# Altium PCB Placa.PcbDoc
Units mm, origin at the board's own origin, x right, y up, seen from the top; angles counter-clockwise.
Board outline 100 x 100 mm, 2 copper layers (Top Layer, Bottom Layer); 78 components, 64 nets, 247 pads, 21 vias.
Unrouted connection lines stored in the file: 1.
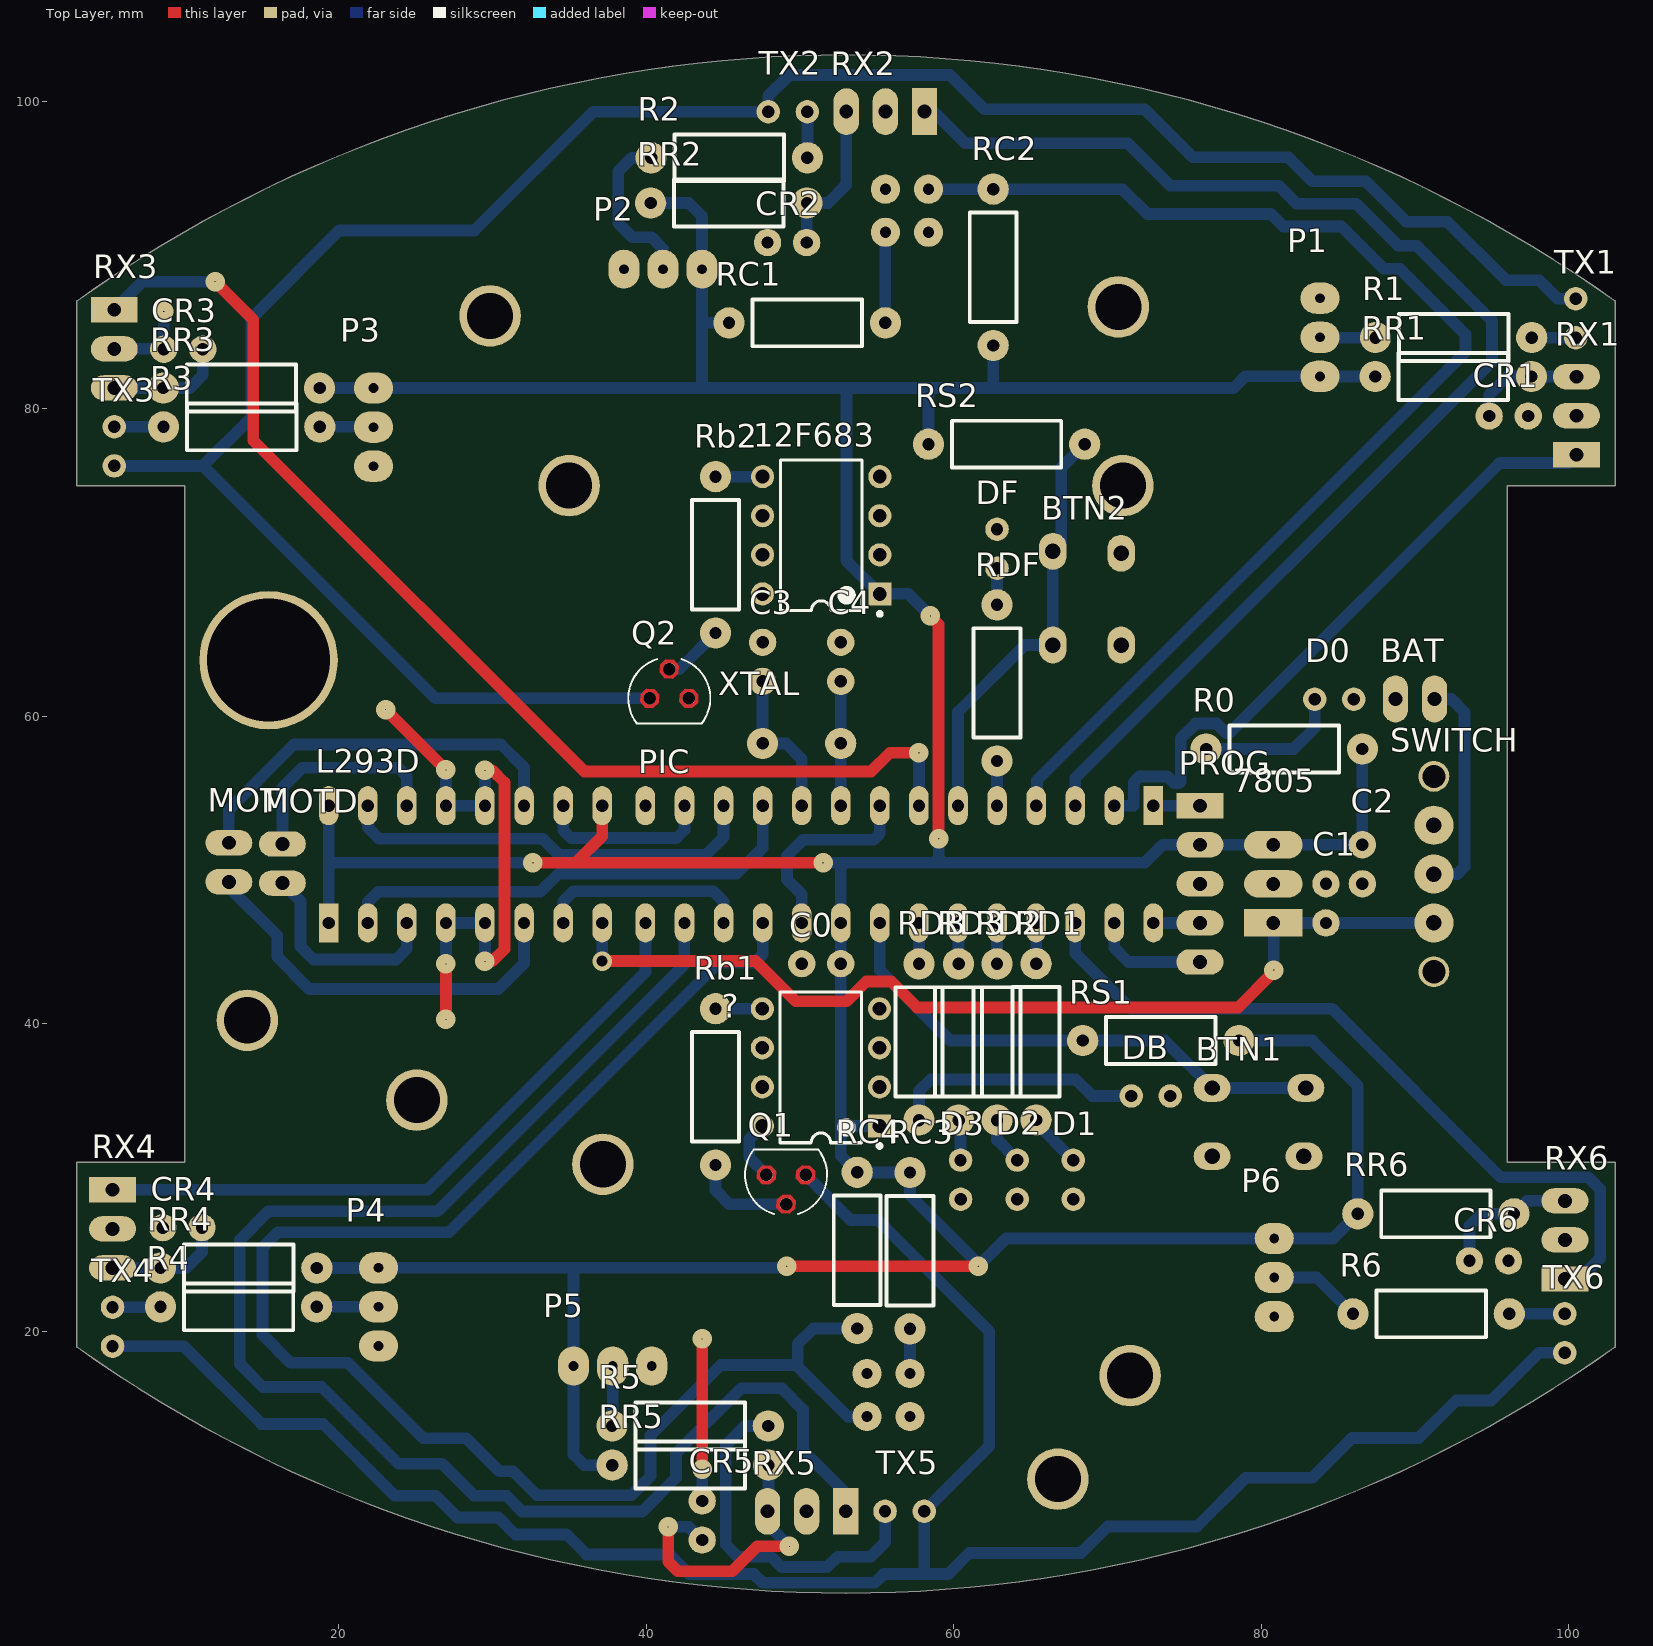
[diagram p0: Top Layer view]
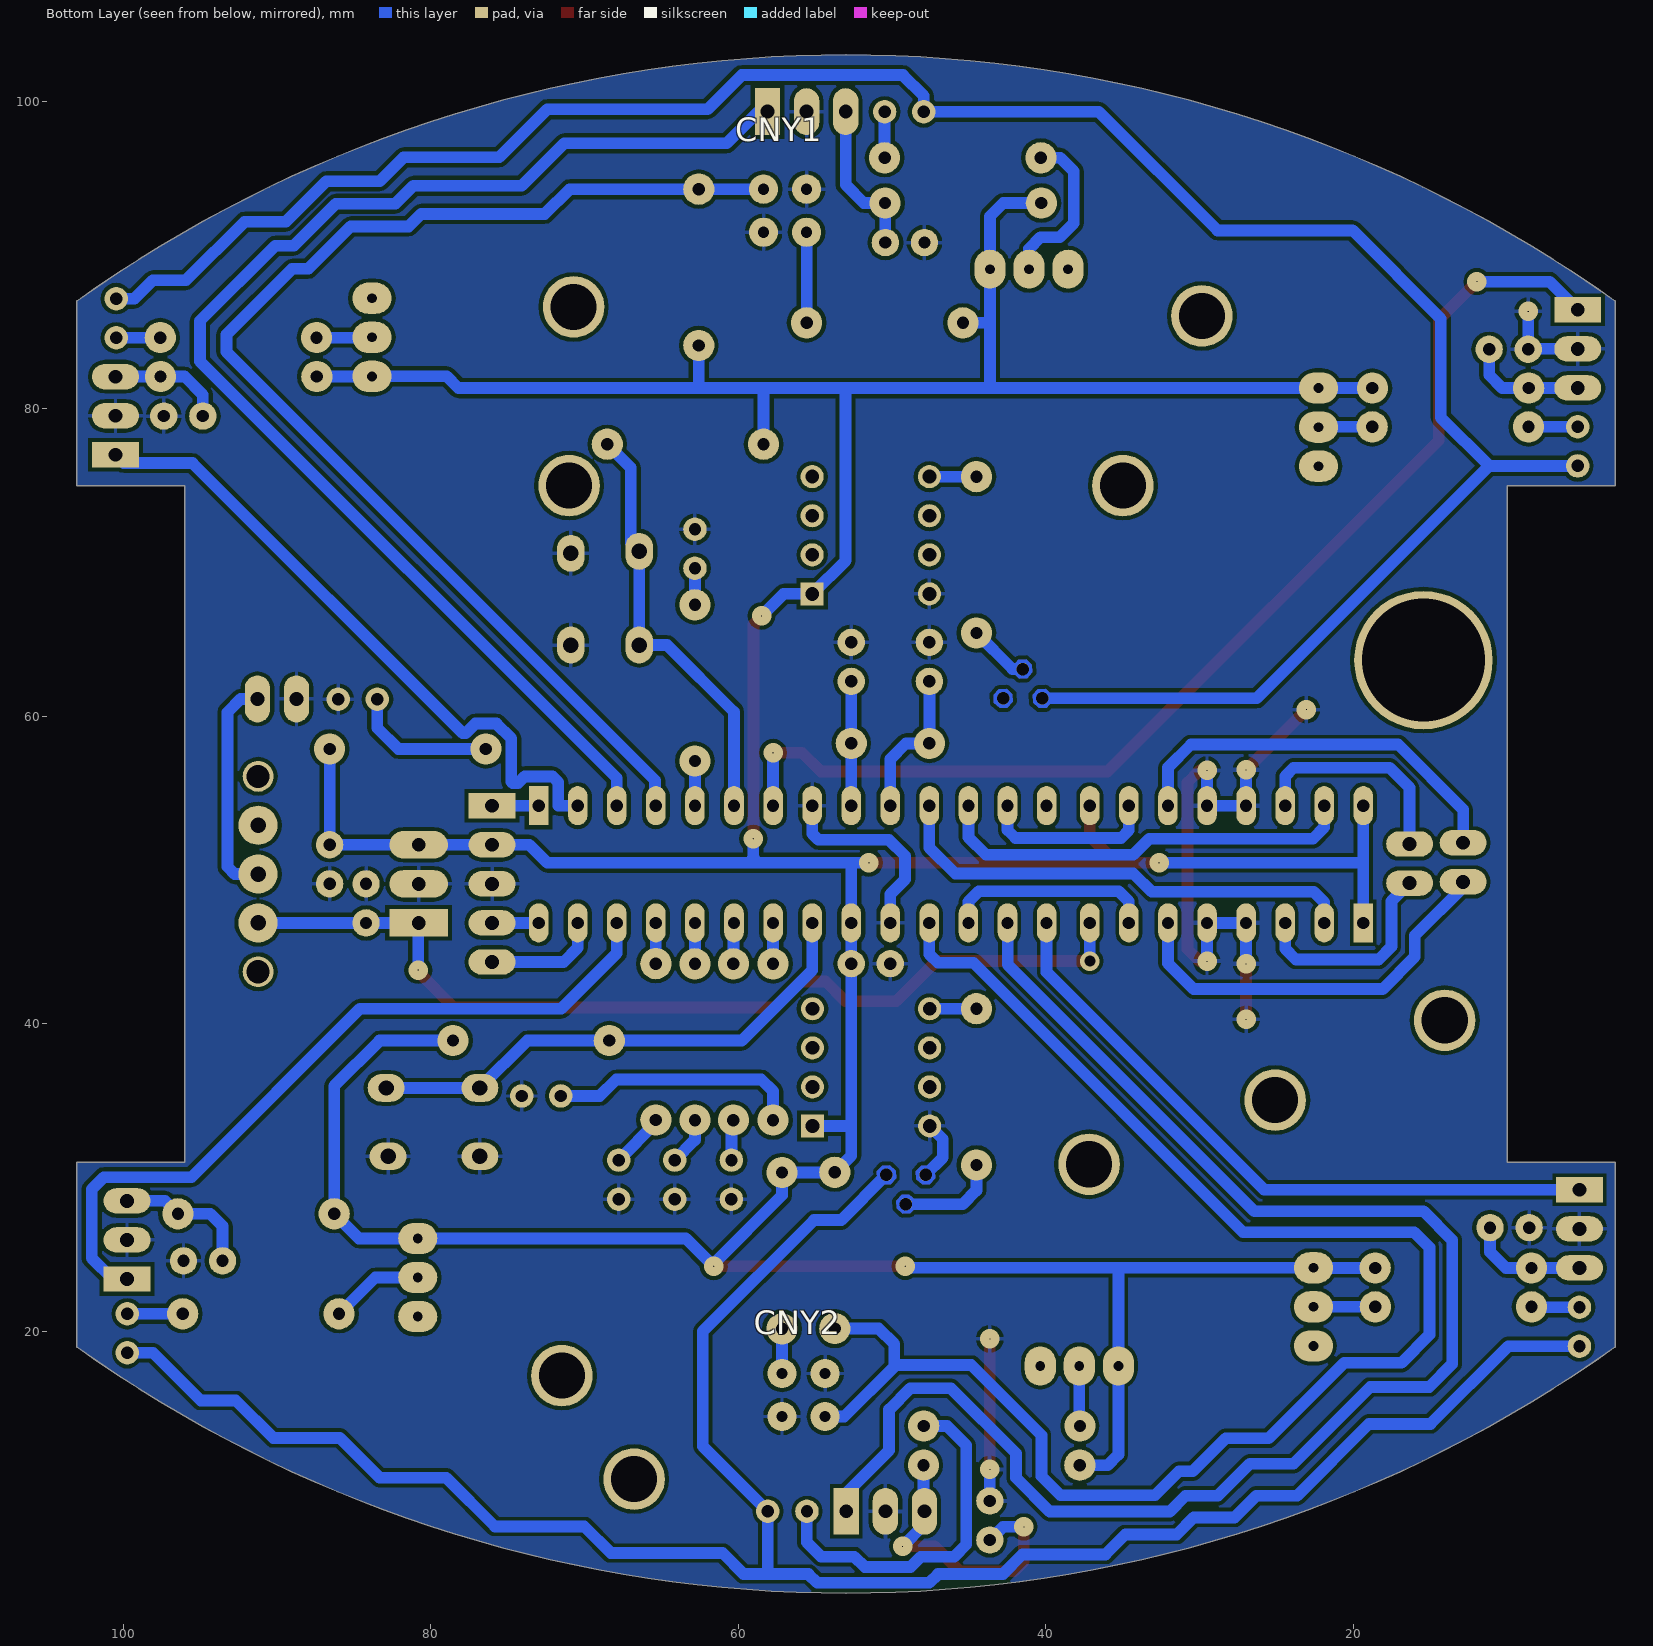
[diagram p1: Bottom Layer view, seen from below]
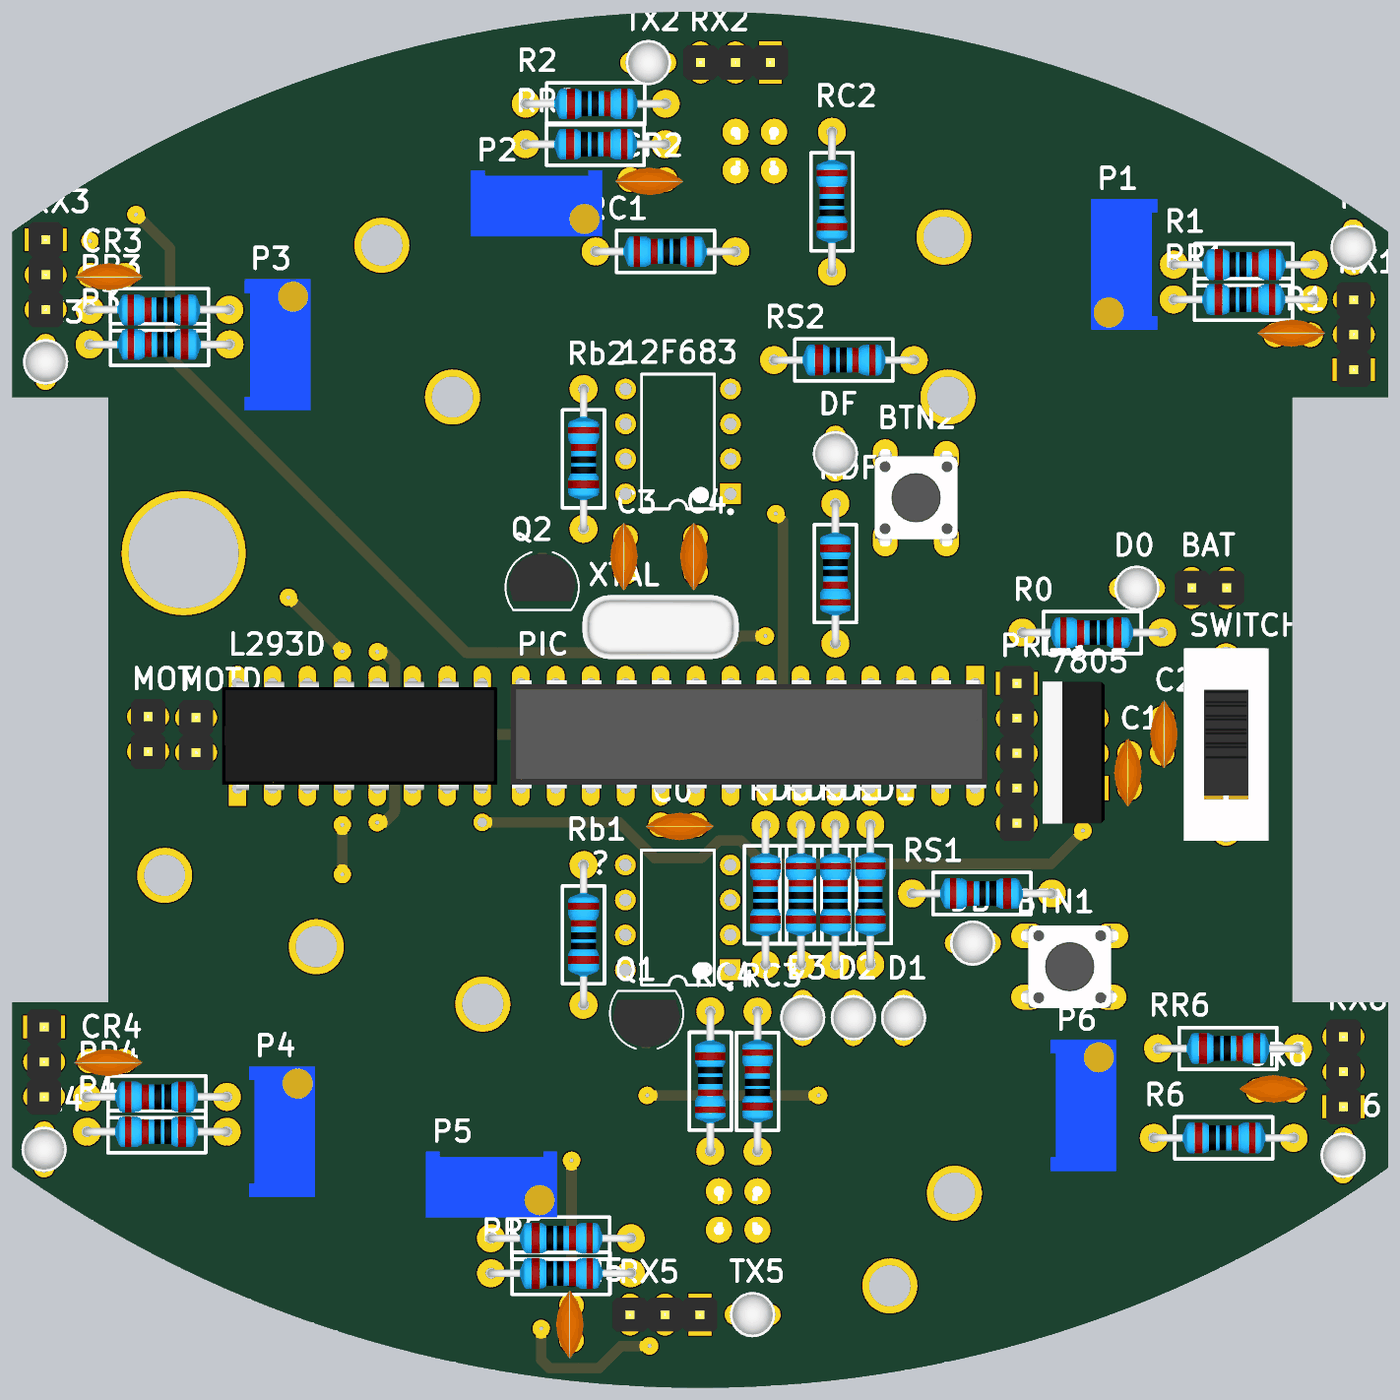
[diagram p2: 3D render of the assembled board from above, using the file's embedded part models]

## Layer stack, top to bottom
Top Solder: solder mask 0.0102, Solder Resist, Dk 3.5
Top Layer: signal copper 0.0356
Dielectric 1: dielectric 0.32, FR-4, Dk 4.8
Bottom Layer: signal copper 0.0356
Bottom Solder: solder mask 0.0102, Solder Resist, Dk 3.5

## Board outline
3,19 3,31 10,31 10,75 3,75 3,87 cw(c53,16.875) 103,87 103,75 96,75 96,31 103,31 103,19 cw(c53,89.125)

## Design rules (kind name [scope] priority, off if disabled: settings)
Clearance [All] p1: gap=0.254
PolygonConnect [All] p1: connectstyle=Relief reliefconductorwidth=0.254 reliefentries=4 polygonreliefangle="90 Angle" airgapwidth=0.254
RoutingVias [All] p1: holewidth=0.711 width=1.27 viastyle="Through Hole" minholewidth=0.711 minwidth=1.27 maxholewidth=0.711 maxwidth=1.27
SolderMaskExpansion [All] p1: expansion=0.102
Width [All] p1: maxlimit=1.524 minlimit=0.762 preferedwidth=0.762
30 further rules are at their usual default settings.

## Components (designator, comment, footprint, x,y, rotation, side; value= is the part's Value field where it differs from the comment)
12F683 "PIC12F683" PDIP300-P8 51.388,71.77 r180 top
7805 "LM78XX" TO-220-STRAIGHT 80.78,46.57 r180 top
? "PIC12F683" PDIP300-P8 51.37,37.18 r180 top
BAT "Header 1x2" "HEADER 1x2" 89.99,61.13 r270 top
BTN1 "BUTTON_SMALL_4PIN" TACT_SWITCH-SMALL-4PIN 77.308,31.395 r0 top
BTN2 "BUTTON_SMALL_4PIN" TACT_SWITCH-SMALL-4PIN 70.89,65.14 r90 top
C0 "CAP-CER" CAP-CER 51.771,43.92 r0 top
C1 "CAP-CER" CAP-CER 84.2,47.459 r270 top
C2 "CAP-CER" CAP-CER 86.57,50.761 r90 top
C3 "CAP-CER" CAP-CER 47.578,63.16 r270 top
C4 "CAP-CER" CAP-CER 52.66,63.16 r270 top
CNY1 "CNY70" CNY70 57.26,92.17 r0 bottom
CNY2 "CNY70" CNY70 55.46,16.58 r180 bottom
CR1 "" CAP-CER 95.699,79.52 r180 top
CR2 "" CAP-CER 49.551,90.8 r0 top
CR3 "" CAP-CER 10.301,83.86 r0 top
CR4 "" CAP-CER 10.24,26.76 r0 top
CR5 "" CAP-CER 43.65,7.34 r270 top
CR6 "" CAP-CER 94.419,24.6 r180 top
D0 "LED" LED-3MM-RED 84.74,61.11 r0 top
D1 "LED" LED-3MM-RED 67.78,29.88 r270 top
D2 "LED" LED-3MM-YELLOW 64.13,29.88 r270 top
D3 "LED" LED-3MM-GREEN 60.45,29.88 r270 top
DB "LED" LED-3MM-GREEN 72.81,35.32 r0 top
DF "LED" LED-3MM-GREEN 62.82,70.89 r90 top
L293D "L293" DIP16 19.37,46.57 r90 top
MOTD "" "HEADER 1x2" 16.36,50.43 r0 top
MOTI "" "HEADER 1x2" 12.88,50.51 r180 top
P1 "" POT-10TURN 83.82,84.64 r90 top
P2 "" POT-10TURN 41.1,89.07 r180 top
P3 "" POT-10TURN 22.28,78.8 r270 top
P4 "" POT-10TURN 22.61,21.61 r270 top
P5 "" POT-10TURN 37.83,17.77 r180 top
P6 "" POT-10TURN 80.84,23.52 r270 top
PIC "PIC18F2550" DIP28 72.98,54.19 r270 top
PROG "" "Header 1x5" 76.01,54.19 r0 top
Q1 "2N2222A" TO-92 49.1,29.24 r180 top
Q2 "2N2222A" TO-92 41.51,62.122 r0 top
R0 "RES" RES-Axial-400mil 76.41,57.88 r0 top
R1 "" RES-Axial-400mil 97.58,84.62 r180 top
R2 "" RES-Axial-400mil 50.49,96.31 r180 top
R3 "" RES-Axial-400mil 8.63,78.82 r0 top
R4 "" RES-Axial-400mil 8.43,21.61 r0 top
R5 "" RES-Axial-400mil 47.95,13.87 r180 top
R6 "" RES-Axial-400mil 96.12,21.16 r180 top
Rb1 "" RES-Axial-400mil 44.52,40.99 r270 top
Rb2 "" RES-Axial-400mil 44.52,75.58 r270 top
RC1 "RES" RES-Axial-400mil 45.4,85.58 r0 top
RC2 "RES" RES-Axial-400mil 62.57,94.27 r270 top
RC3 "RES" RES-Axial-400mil 57.16,30.34 r270 top
RC4 "RES" RES-Axial-400mil 53.73,20.2 r90 top
RD1 "RES" RES-Axial-400mil 65.36,43.92 r270 top
RD2 "RES" RES-Axial-400mil 62.82,43.91 r270 top
RD3 "RES" RES-Axial-400mil 60.32,43.91 r270 top
RDB "RES" RES-Axial-400mil 57.74,43.91 r270 top
RDF "RES" RES-Axial-400mil 62.82,57.09 r90 top
RR1 "RES" RES-Axial-400mil 97.56,82.09 r180 top
RR2 "RES" RES-Axial-400mil 50.46,93.37 r180 top
RR3 "RES" RES-Axial-400mil 8.62,81.34 r0 top
RR4 "RES" RES-Axial-400mil 8.44,24.14 r0 top
RR5 "RES" RES-Axial-400mil 47.96,11.32 r180 top
RR6 "RES" RES-Axial-400mil 96.43,27.66 r180 top
RS1 "RES" RES-Axial-400mil 68.39,38.92 r0 top
RS2 "RES" RES-Axial-400mil 68.52,77.69 r180 top
RX1 "TSSP58038" "Header 1x3" 100.49,77 r180 top
RX2 "TSSP58038" "Header 1x3" 58.1,99.31 r270 top
RX3 "TSSP58038" "Header 1x3" 5.43,86.43 r0 top
RX4 "TSSP58038" "Header 1x3" 5.32,29.22 r0 top
RX5 "TSSP58038" "Header 1x3" 52.98,8.32 r270 top
RX6 "TSSP58038" "Header 1x3" 99.74,23.42 r180 top
SWITCH "SLIDE-SWITCH" SWITCH 91.22,49.745 r90 top
TX1 "LED" LED-3MM-YELLOW 100.44,85.88 r90 top
TX2 "LED" LED-3MM-YELLOW 49.22,99.3 r180 top
TX3 "LED" LED-3MM-YELLOW 5.43,77.55 r270 top
TX4 "LED" LED-3MM-YELLOW 5.32,20.32 r270 top
TX5 "LED" LED-3MM-YELLOW 56.81,8.32 r0 top
TX6 "LED" LED-3MM-YELLOW 99.72,19.89 r270 top
XTAL "XTAL" HC-49/S 49.61,58.24 r0 top

## Footprints (in the part's own frame and the unit in brackets; to place one, negate y for a bottom-side part, rotate by r counter-clockwise, add the part's x,y. Pads: shape width x height; smd on the part's side, far side on the other; paste and mask are expansions set on the pad)
CAP-CER [mil]
  round 70 hole 31.5: 1(-65,0) 2(35,0)
  body extent -107,-44 87,34, height 207
CNY70 [mm]
  round 1.9 hole 0.73: A(-1.7,0.7) C(1.1,-2.1) E(1.1,0.7) K(-1.7,-2.1)
  body extent -3.8,-4.47 3.2,2.5, height 6
DIP16 [mm]
  rect 2.54x1.27 hole 0.8: 1(0,0)
  oval 2.54x1.27 hole 0.8: 2(0,-2.54) 3(0,-5.08) 4(0,-7.62) 5(0,-10.16) 6(0,-12.7) 7(0,-15.24) 8(0,-17.78) 9(7.62,-17.78) 10(7.62,-15.24) 11(7.62,-12.7) 12(7.62,-10.16) 13(7.62,-7.62) 14(7.62,-5.08) 15(7.62,-2.54) 16(7.62,0)
  body extent -0.12,-18.89 7.75,1.11, height 5.1
DIP28 [mm]
  rect 2.54x1.27 hole 0.8: 1(0,0)
  oval 2.54x1.27 hole 0.8: 2(0,-2.54) 3(0,-5.08) 4(0,-7.62) 5(0,-10.16) 6(0,-12.7) 7(0,-15.24) 8(0,-17.78) 9(0,-20.32) 10(0,-22.86) 11(0,-25.4) 12(0,-27.94) 13(0,-30.48) 14(0,-33.02) 15(7.62,-33.02) 16(7.62,-30.48) 17(7.62,-27.94) 18(7.62,-25.4) 19(7.62,-22.86) 20(7.62,-20.32) 21(7.62,-17.78) 22(7.62,-15.24) 23(7.62,-12.7) 24(7.62,-10.16) 25(7.62,-7.62) 26(7.62,-5.08) 27(7.62,-2.54) 28(7.62,0)
  body extent -0.25,-33.76 7.65,0.89, height 5.09
HC-49/S [mil]
  round 80 hole 31.5: 1(-80,0) 2(120,0)
  body extent -203,-90 243,93, height 138
"HEADER 1x2" [mil]
  oval 120x65 hole 35.43: 1(0,50) 2(0,-50)
  body extent -49,-100 49,100, height 336
"Header 1x3" [mil]
  rect 120x65 hole 35.43: 1(0,0)
  oval 120x65 hole 35.43: 2(0,-100) 3(0,-200)
  body extent -49,-250 49,50, height 336
"Header 1x5" [mil]
  rect 120x65 hole 35.43: 1(0,0)
  oval 120x65 hole 35.43: 2(0,-100) 3(0,-200) 4(0,-300) 5(0,-400)
  body extent -49,-450 49,50, height 336
LED-3MM-GREEN [mil]
  round 60 hole 31.5: A(-50,0) K(50,0)
  body extent -66,-65 64,65, height 217
LED-3MM-RED [mil]
  round 60 hole 31.5: A(-50,0) K(50,0)
  body extent -66,-65 64,65, height 217
LED-3MM-YELLOW [mil]
  round 60 hole 31.5: A(-50,0) K(50,0)
  body extent -66,-65 64,65, height 217
PDIP300-P8 [mm] "DIP, 8-Leads, Row Spacing 7.62mm, Pitch 2.54mm, Body 9.5x6.6mm"
  rect 1.5x1.5 hole 0.9: 1(-3.81,3.81)
  round 1.5 hole 0.9: 2(-3.81,1.27) 3(-3.81,-1.27) 4(-3.81,-3.81) 5(3.81,-3.81) 6(3.81,-1.27) 7(3.81,1.27) 8(3.81,3.81)
  silkscreen extent -3.94,-4.9 2.65,5.23, body extent -3.55,-4.9 3.55,4.9, height 5.34
POT-10TURN [mil]
  oval 80x100 hole 25: 1(-100,0) 2(0,0) 3(100,0)
  body extent -188,-94 188,94, height 455
RES-Axial-400mil [mil]
  round 80 hole 31.5: 1(0,0) 2(400,0)
  silkscreen extent 60,-60 340,60, body extent -12,-44 410,44, height 94
SWITCH [mm]
  round 2.54 hole 1: 1(-3.175,0) 2(0,0) 3(3.175,0)
  round 2 hole 1.5: 4(-6.35,0) 4(6.35,0)
  body extent -7,-3.1 7,3.1, height 9.65
TACT_SWITCH-SMALL-4PIN [mm]
  oval 2.4x1.8 hole 1: 1(-0.508,4.445) 1(5.588,4.445) 2(-0.508,0) 2(5.461,0)
  body extent -1.45,-0.79 6.53,5.21, height 5.15
TO-92 [mil]
  round 32 hole 32: B(0,37.5) C(-50,-37.5) E(50,-37.5)
  Top Layer region: -25.57,-28.61 -39.01,-13.94 -58.89,-13.07 -73.56,-26.51 -74.43,-46.39 -60.99,-61.06 -41.11,-61.93 -26.44,-48.49
  Top Layer region: 24.43,46.39 10.99,61.06 -8.89,61.93 -23.56,48.49 -24.43,28.61 -10.99,13.94 8.89,13.07 23.56,26.51
  Top Layer region: 74.43,-28.61 60.99,-13.94 41.11,-13.07 26.44,-26.51 25.57,-46.39 39.01,-61.06 58.89,-61.93 73.56,-48.49
  Bottom Layer region: -25.57,-28.61 -39.01,-13.94 -58.89,-13.07 -73.56,-26.51 -74.43,-46.39 -60.99,-61.06 -41.11,-61.93 -26.44,-48.49
  Bottom Layer region: 24.43,46.39 10.99,61.06 -8.89,61.93 -23.56,48.49 -24.43,28.61 -10.99,13.94 8.89,13.07 23.56,26.51
  Bottom Layer region: 74.43,-28.61 60.99,-13.94 41.11,-13.07 26.44,-26.51 25.57,-46.39 39.01,-61.06 58.89,-61.93 73.56,-48.49
  Multi-Layer region: -25.57,-28.61 -39.01,-13.94 -58.89,-13.07 -73.56,-26.51 -74.43,-46.39 -60.99,-61.06 -41.11,-61.93 -26.44,-48.49
  Multi-Layer region: 24.43,46.39 10.99,61.06 -8.89,61.93 -23.56,48.49 -24.43,28.61 -10.99,13.94 8.89,13.07 23.56,26.51
  Multi-Layer region: 74.43,-28.61 60.99,-13.94 41.11,-13.07 26.44,-26.51 25.57,-46.39 39.01,-61.06 58.89,-61.93 73.56,-48.49
  silkscreen extent -105,-103 105,63, body extent -95,-77 95,58, height 290
TO-220-STRAIGHT [mm]
  rect 3.81x1.778 hole 0.9: 1(0,0)
  oval 3.81x1.778 hole 0.9: 2(0,-2.54) 3(0,-5.08)
  body extent -1.61,-7.75 2.88,2.55, height 16.8

## Part data
CR1 CR2 CR3 CR4 CR5 CR6: library part CAP-CER
MOTD MOTI: library part "Header 1x2"
P1 P2 P3 P4 P5 P6: library part POT
PROG: library part "Header Programmer"
Q1 Q2: library part NPN
R1 R2 R3 R4 R5 R6 Rb1 Rb2: library part RES

## Free pads (board coordinates)
  round 4 hole 3: 2(14.08,40.24) 4(35,75) 5(71,75) 6(37.2,30.88) 7(71.47,17.14) 8(25.1,35.05) 9(66.78,10.41) 10(70.71,86.62) 11(29.86,86.03)
  round 9 hole 8: 3(15.46,63.65)

## Via types
v1: diameter 1.27, hole 0, Top Layer to Bottom Layer, 20 vias
v2: diameter 1.27, hole 0.711, Top Layer to Bottom Layer, 1 vias

## Nets (pads, with @x,y where several pads share a name; then routed paths per layer and width w, separated by ;. In a path a pad name is that pad's centre, name@x,y a point inside that pad or via, vN(x,y) a via of type N, cw(c..) or ccw(c..) an arc to the next point about the centre after c; other vN are vias at no path point)
38KA: 12F683.5 Rb2.1 | length 3.1
  Bottom Layer w0.762: Rb2.1 12F683.5
38KB: ?.5 Rb1.1 | length 3
  Bottom Layer w0.762: Rb1.1 ?.5
BTN1: BTN1.1 PIC.21 RS1.1 | length 33.9
  Bottom Layer w0.762: PIC.21 55.2,43.49 59.77,38.92 RS1.1 73.72,38.92 76.8,35.84 BTN1.1@82.896,35.84
BTN2: BTN2.1 PIC.6 RS2.1 | length 28
  Bottom Layer w0.762: PIC.6 60.28,60.28 64.632,64.632 66.445,64.632 66.445,70.728 67,71.283 67,76.17 RS2.1
CNY1: CNY1.C PIC.4 RC2.1 | length 81
  Bottom Layer w0.762: CNY1.C RC2.1 70.97,94.27 72.58,92.66 80.62,92.66 81.43,91.85 85.19,91.85 87.95,89.09 89.01,89.09 93.28,84.82 93.28,83.7 65.41,55.83 65.41,54.24 PIC.4
CNY2: CNY2.C PIC.18 RC4.1 | length 103.9
  Bottom Layer w0.762: PIC.18 47.58,44.54 47.02,43.98 44.71,43.98 27.19,26.46 16.05,26.46 15.07,25.48 15.07,19.79 16.88,17.98 20.61,17.98 25.53,13.06 28.32,13.06 30.46,10.92 31.35,10.92 32.91,9.36 39.057,9.36 40.29,10.593 40.29,13.26 44.86,17.83 49.87,17.83 ; RC4.1 50.87,20.2 49.87,19.2 49.87,17.83 ; CNY2.C 53.11,14.48 49.87,17.72 49.87,17.83
GND: 12F683.8 7805.2 ?.8 BAT.2 BTN1.2 BTN2.2 C0.1 C1.1 C2.1 C3.1 C4.1 CNY1.E CNY1.K CNY2.E CNY2.K CR1.1 CR2.1 CR3.1 CR4.1 CR5.1 CR6.1 D0.K D1.K D2.K D3.K DB.K DF.K L293D.4 L293D.5 L293D.12 L293D.13 PIC.8 PIC.19 PROG.3 Q1.E Q2.E RX1.2 RX2.2 RX3.2 RX4.2 RX5.2 RX6.2 | length 71.5
  Top Layer w0.762: v1(23.07,60.44) v1(26.99,56.52) ; v1(26.99,40.3) v1(26.99,43.91) ; v1(29.53,44.07) 30.01,44.07 30.8,44.86 30.8,55.7 30.01,56.49 v1(29.53,56.49) ; v1(43.65,11.04) v1(43.65,19.53)
  Bottom Layer w0.762: RX3.2 8.62,83.89 CR3.1 v1(8.65,86.33) ; v1(26.99,43.91) L293D.4 L293D.5 v1(29.53,44.07) ; v1(26.99,56.52) L293D.13 L293D.12 v1(29.53,56.49) ; CR5.1 v1(43.65,11.04) ; ?.8 46.71,32.52 46.71,31.313 Q1.E ; PIC.19 50.12,48.44 49.16,49.4 49.16,50.92 50.21,51.97 54.8,51.97 55.2,52.37 PIC.8
LED1: PIC.25 RD1.1 | length 2.6
  Bottom Layer w0.762: RD1.1 PIC.25
LED2: PIC.24 RD2.1 | length 2.7
  Bottom Layer w0.762: RD2.1 PIC.24
LED3: PIC.23 RD3.1 | length 2.7
  Bottom Layer w0.762: PIC.23 60.32,46.53 RD3.1
LED_B: PIC.22 RDB.1 | length 2.7
  Bottom Layer w0.762: RDB.1 PIC.22
LED_F: PIC.5 RDF.1 | length 2.9
  Bottom Layer w0.762: PIC.5 RDF.1
MOTDA: L293D.2 PIC.11 | length 31.2
  Bottom Layer w0.762: L293D.2 21.91,47.91 22.59,48.59 33.13,48.59 34.32,49.78 45.9,49.78 47.58,51.46 PIC.11
MOTDB: L293D.15 PIC.12 | length 27.8
  Bottom Layer w0.762: L293D.15 21.91,52.78 22.64,52.05 33.28,52.05 34.33,51 43.9,51 45.04,52.14 PIC.12
MOTIA: L293D.10 PIC.13 | length 11.5
  Bottom Layer w0.762: L293D.10 34.61,52.6 35.12,52.09 41.98,52.09 42.5,52.61 PIC.13
MOTIB: L293D.7 PIC.17 | length 13.8
  Bottom Layer w0.762: L293D.7 34.61,47.97 35.26,48.62 44.37,48.62 45.04,47.95 PIC.17
NetBAT_1: BAT.1 SWITCH.2 | length 14.5
  Bottom Layer w0.762: SWITCH.2 92.735,49.745 93.21,50.22 93.21,60.27 92.35,61.13 BAT.1
NetCNY1_A: CNY1.A RC1.2 | length 5.9
  Bottom Layer w0.762: RC1.2 CNY1.A
NetCNY2_A: CNY2.A RC3.2 | length 2.9
  Bottom Layer w0.762: CNY2.A RC3.2
NetCR1_2: CR1.2 RR1.1 RX1.3 | length 7.6
  Bottom Layer w0.762: CR1.2 94.81,80.9 96,82.09 RR1.1 100.48,82.09 RX1.3
NetCR2_2: CR2.2 RR2.1 RX2.3 | length 10.4
  Bottom Layer w0.762: CR2.2 50.44,93.35 RR2.1 51.84,93.37 53.02,94.55 RX2.3
NetCR3_2: CR3.2 RR3.1 RX3.3 | length 7.8
  Bottom Layer w0.762: RX3.3 8.61,81.35 RR3.1 10.34,81.34 11.19,82.19 CR3.2
NetCR4_2: CR4.2 RR4.1 RX4.3 | length 7.8
  Bottom Layer w0.762: RX4.3 RR4.1 10.1,24.14 11.129,25.169 CR4.2
NetCR5_2: CR5.2 RR5.1 RX5.3 | length 19.8
  Top Layer w0.762: v1(41.44,7.31) 41.44,5.05 42.07,4.42 45.61,4.42 47.23,6.04 v1(49.32,6.04)
  Bottom Layer w0.762: v1(41.44,7.31) 42.791,7.31 CR5.2 ; RX5.3 47.9,7.46 v1(49.32,6.04) ; RX5.3@47.92,8 47.96,8.04 RR5.1
NetCR6_2: CR6.2 RR6.1 RX6.3 | length 9.1
  Bottom Layer w0.762: CR6.2 93.53,26.86 94.33,27.66 RR6.1 97.27,28.5 RX6.3
NetD0_A: D0.A R0.1 | length 9.5
  Bottom Layer w0.762: R0.1 82.11,57.88 83.47,59.24 D0.A
NetD1_A: D1.A RD1.2 | length 3.6
  Bottom Layer w0.762: RD1.2 65.36,33.57 D1.A
NetD2_A: D2.A RD2.2 | length 3.1
  Bottom Layer w0.762: RD2.2 62.82,32.46 D2.A
NetD3_A: D3.A RD3.2 | length 2.7
  Bottom Layer w0.762: RD3.2 60.45,33.62 D3.A
NetDB_A: DB.A RDB.2 | length 16.4
  Bottom Layer w0.762: RDB.2 57.74,35.62 58.51,36.39 67.93,36.39 69,35.32 DB.A
NetDF_A: DF.A RDF.2 | length 2.4
  Bottom Layer w0.762: RDF.2 DF.A
NetL293D_3: L293D.3 MOTD.2 | length 13.8
  Bottom Layer w0.762: MOTD.2 17.54,47.98 17.54,45.03 18.38,44.19 23.75,44.19 24.45,44.89 L293D.3
NetL293D_6: L293D.6 MOTI.1 | length 26.4
  Bottom Layer w0.762: MOTI.1 12.88,48.89 16.02,45.75 16.02,44.37 18.12,42.27 30.4,42.27 32.07,43.94 L293D.6
NetL293D_11: L293D.11 MOTI.2 | length 26.2
  Bottom Layer w0.762: MOTI.2 12.88,53.94 17.11,58.17 30.57,58.17 32.07,56.67 L293D.11
NetL293D_14: L293D.14 MOTD.1 | length 14.4
  Bottom Layer w0.762: MOTD.1 16.36,55.35 17.66,56.65 23.91,56.65 24.45,56.11 L293D.14
NetP1_2: P1.2 R1.2 | length 4.3
  Bottom Layer w0.762: P1.2@83.28,84.63 83.82,84.63 P1.2@83.825,84.635 ; P1.2 P1.2@83.825,84.635 ; P1.2@83.92,84.73 P1.2@83.825,84.635 ; R1.2 83.84,84.62 P1.2@83.825,84.635
NetP2_2: P2.2 R2.2 | length 10.8
  Bottom Layer w0.762: R2.2 39.07,96.31 38.2,95.44 38.2,92.05 39.11,91.14 40.36,91.14 41.1,90.4 P2.2
NetP3_2: P3.2 R3.2 | length 3.5
  Bottom Layer w0.762: R3.2 22.26,78.82 P3.2
NetP4_2: P4.2 R4.2 | length 4
  Bottom Layer w0.762: R4.2 P4.2
NetP5_2: P5.2 R5.2 | length 3.9
  Bottom Layer w0.762: R5.2 37.83,13.91 P5.2
NetP6_2: P6.2 R6.2 | length 6.1
  Bottom Layer w0.762: P6.2 83.6,23.52 R6.2
NetQ1_B: Q1.B Rb1.2 | length 6.6
  Bottom Layer w0.762: Rb1.2 44.52,29.18 45.412,28.287 Q1.B
NetQ1_C: Q1.C TX4.K TX5.K TX6.K | length 140.2
  Bottom Layer w0.762: TX4.K 9.95,19.05 15,14 19,14 23.67,9.33 26.33,9.33 27.74,7.92 30.39,7.92 31.5,6.81 34.835,6.81 36.135,5.51 41.53,5.51 42.8,4.24 47.015,4.24 47.585,3.67 54.875,3.67 55.445,4.24 59.66,4.24 61.03,5.61 68.3,5.61 70.02,7.33 75.82,7.33 78.99,10.5 83.32,10.5 85.91,13.09 90.24,13.09 92.67,15.52 94.95,15.52 98.05,18.62 TX6.K ; Q1.C 53.313,27.25 55.08,27.25 62.31,20.02 62.31,12.55 TX5.K 58.08,4.7
NetQ2_B: Q2.B Rb2.2 | length 4
  Bottom Layer w0.762: Q2.B 42.175,63.075 Rb2.2
NetQ2_C: Q2.C TX1.K TX2.K TX3.K | length 151.2
  Bottom Layer w0.762: TX3.K 11.19,76.28 ; Q2.C 26.3,61.17 11.19,76.28 ; TX1.K 99.26,87.15 98.06,88.35 95.91,88.35 92.1,92.16 89.41,92.16 86.78,94.79 83.31,94.79 81.76,96.34 75.55,96.34 72.42,99.47 62,99.47 59.78,101.69 49.3,101.69 47.95,100.34 TX2.K 36.56,99.3 28.85,91.59 20.07,91.59 14.33,85.85 14.33,79.42 11.19,76.28
NetR1_1: R1.1 TX1.A | length 2.9
  Bottom Layer w0.762: R1.1 97.59,84.61 TX1.A
NetR2_1: R2.1 TX2.A | length 3
  Bottom Layer w0.762: R2.1 TX2.A
NetR3_1: R3.1 TX3.A | length 3.2
  Bottom Layer w0.762: TX3.A R3.1
NetR4_1: R4.1 TX4.A | length 3.1
  Bottom Layer w0.762: TX4.A 8.41,21.59 R4.1
NetR5_1: R5.1 TX5.A | length 23.1
  Bottom Layer w0.762: R5.1 46.44,13.87 45.18,12.61 45.18,6.16 45.97,5.37 48.133,5.37 48.803,4.7 51.787,4.7 52.457,5.37 54.62,5.37 55.56,6.31 TX5.A@55.56,8
NetR6_1: R6.1 TX6.A | length 3.6
  Bottom Layer w0.762: R6.1 TX6.A
PGC: PIC.27 PROG.5 | length 7.6
  Bottom Layer w0.762: PIC.27 70.44,44.95 71.36,44.03 PROG.5
PGD: PIC.28 PROG.4 | length 3
  Bottom Layer w0.762: PIC.28 PROG.4
RX1: PIC.2 RX1.1 | length 42.9
  Bottom Layer w0.762: PIC.2 71.71,54.19 71.71,55.723 72.082,56.095 73.878,56.095 74.323,55.651 74.671,55.651 74.759,55.739 74.759,58.564 75.726,59.531 77.094,59.531 77.729,58.896 77.916,58.896 95.49,76.47 99.96,76.47 RX1.1
RX2: PIC.3 RX2.1 | length 85.3
  Bottom Layer w0.762: RX2.1 58.7,99.31 60.76,97.25 71.32,97.25 74.08,94.49 81.12,94.49 82.29,93.32 86.17,93.32 88.89,90.6 90.1,90.6 95,85.7 95,83.09 67.9,55.99 PIC.3
RX3: PIC.7 RX3.1 | length 74.8
  Top Layer w0.762: v1(11.99,88.26) 14.47,85.78 14.47,77.93 35.98,56.42 54.65,56.42 55.86,57.63 v1(57.74,57.63)
  Bottom Layer w0.762: RX3.1 7.26,88.26 v1(11.99,88.26) ; PIC.7 v1(57.74,57.63)
RX4: PIC.15 RX4.1 | length 43.7
  Bottom Layer w0.762: RX4.1 25.82,29.22 39.96,43.36 PIC.15
RX5: PIC.16 RX5.1 | length 100.3
  Bottom Layer w0.762: PIC.16 42.49,46.56 42.49,43.86 26.45,27.82 15.45,27.82 13.58,25.95 13.58,17.9 15.08,16.4 18.92,16.4 23.91,11.41 26.74,11.41 28.82,9.33 30.93,9.33 31.96,8.3 39.75,8.3 41.95,10.5 41.95,12.08 46.18,16.31 48.82,16.31 50.2,14.93 50.2,12.28 52.98,9.5 RX5.1
RX6: PIC.26 RX6.1 | length 49.8
  Bottom Layer w0.762: PIC.26 67.9,44.6 71.51,40.99 84.6,40.99 95.55,30.04 101.25,30.04 102.04,29.25 102.04,24.78 100.68,23.42 RX6.1
VBAT: 7805.1 C1.2 L293D.8 SWITCH.1 | length 62.9
  Top Layer w0.762: v2(37.15,44.09) 47.12,44.09 49.73,41.48 53.04,41.48 54.32,42.76 55.93,42.76 57.62,41.07 78.5,41.07 v1@80.78,43.35
  Bottom Layer w0.762: v2(37.15,44.09) L293D.8 ; v1(80.81,43.5) 80.81,46.54 7805.1 C1.2 SWITCH.1
VCC: 12F683.1 7805.3 ?.1 C0.2 C2.2 L293D.1 L293D.9 L293D.16 P1.1 P2.1 P3.1 P4.1 P5.3 P6.1 PIC.20 PROG.2 R0.2 RC1.1 RC2.2 RC3.1 RC4.2 RR1.2 RR2.2 RR3.2 RR4.2 RR5.2 RR6.2 RS1.2 RS2.2 | length 348.5
  Top Layer w0.762: v1(32.64,50.48) 35.42,50.48 35.48,50.54 ; L293D.9 37.15,52.21 35.48,50.54 ; v1(49.15,24.25) v1(61.6,24.25) ; v1(51.51,50.48) 35.54,50.48 35.48,50.54 ; v1(58.49,66.53) 58.49,66.5 59.01,65.98 59.01,51.96 59.05,52 59.03,52.02 v1(59.03,52.04)
  Bottom Layer w0.762: RR4.2 22.6,24.14 P4.1 35.29,24.15 ; RR3.2 P3.1 43.68,81.34 ; L293D.1 19.37,50.48 ; L293D.16 19.37,50.48 ; v1(32.64,50.48) 19.37,50.48 ; RR5.2 35.98,11.32 35.29,12.01 P5.3 35.29,24.15 ; RR2.2 42.77,93.37 43.64,92.5 P2.1 43.64,85.6 ; RC1.1 43.66,85.58 43.64,85.6 ; v1(49.15,24.25) 49.05,24.15 35.29,24.15 ; v1(51.51,50.48) 52.66,50.48 ; ?.1 52.66,33.37 ; RS2.2 58.36,81.33 58.37,81.34 ; v1(58.49,66.53) 57.06,67.96 12F683.1 53.03,70.128 53.03,81.33 53.04,81.34 ; v1(59.03,52.04) 59.03,50.83 59.05,50.81 58.91,50.67 59.1,50.48 ; RC2.2 62.57,81.38 62.53,81.34 ; RS1.2 83.32,38.92 86.27,35.97 RR6.2 84.67,26.06 P6.1 63.41,26.06 v1(61.6,24.25) 61.6,24.42 57.16,28.86 RC3.1 53.75,30.34 RC4.2 52.66,31.43 52.66,33.37 ; P1.1@83.82,82.09 RR1.2 ; P1.1 78.95,82.1 78.19,81.34 62.53,81.34 ; R0.2 C2.2 7805.3 PROG.2 73.59,51.65 72.42,50.48 59.1,50.48 ; 43.64,85.6 43.64,81.38 43.68,81.34 ; 43.68,81.34 53.04,81.34 ; 52.66,33.37 C0.2 PIC.20 52.66,50.48 ; 52.66,50.48 59.1,50.48 ; 53.04,81.34 58.37,81.34 ; 58.37,81.34 62.53,81.34
VPP: PIC.1 PROG.1 | length 3
  Bottom Layer w0.762: PIC.1 PROG.1
XTAL1: C4.2 PIC.9 XTAL.2 | length 8.1
  Bottom Layer w0.762: PIC.9 C4.2
XTAL2: C3.2 PIC.10 XTAL.1 | length 10
  Bottom Layer w0.762: C3.2 XTAL.1 49.1,58.24 50.12,57.22 PIC.10
pads on no net: 12F683.2 12F683.3 12F683.4 12F683.6 12F683.7 ?.2 ?.3 ?.4 ?.6 ?.7 P1.3 P2.3 P3.3 P4.3 P5.1 P6.3 PIC.14 SWITCH.3 SWITCH.4

## Polygon pours and split planes (outlines as drawn)
GND on Bottom Layer "GND_PLANE" (solid, pour order 0): 3,19 3,31 10,31 10,75 3,75 3,87 cw(c53,16.875) 103,87 103,75 96,75 96,31 103,31 103,19 cw(c53,89.125)